# Altium PCB Staravia.PcbDoc
Units mil, origin at the board's own origin, x right, y up, seen from the top; angles counter-clockwise.
Board outline 2560 x 2200 mil, 2 copper layers (Top Layer, Bottom Layer); 17 components, 21 nets, 102 pads, 92 vias.
Unrouted connection lines stored in the file: 20.
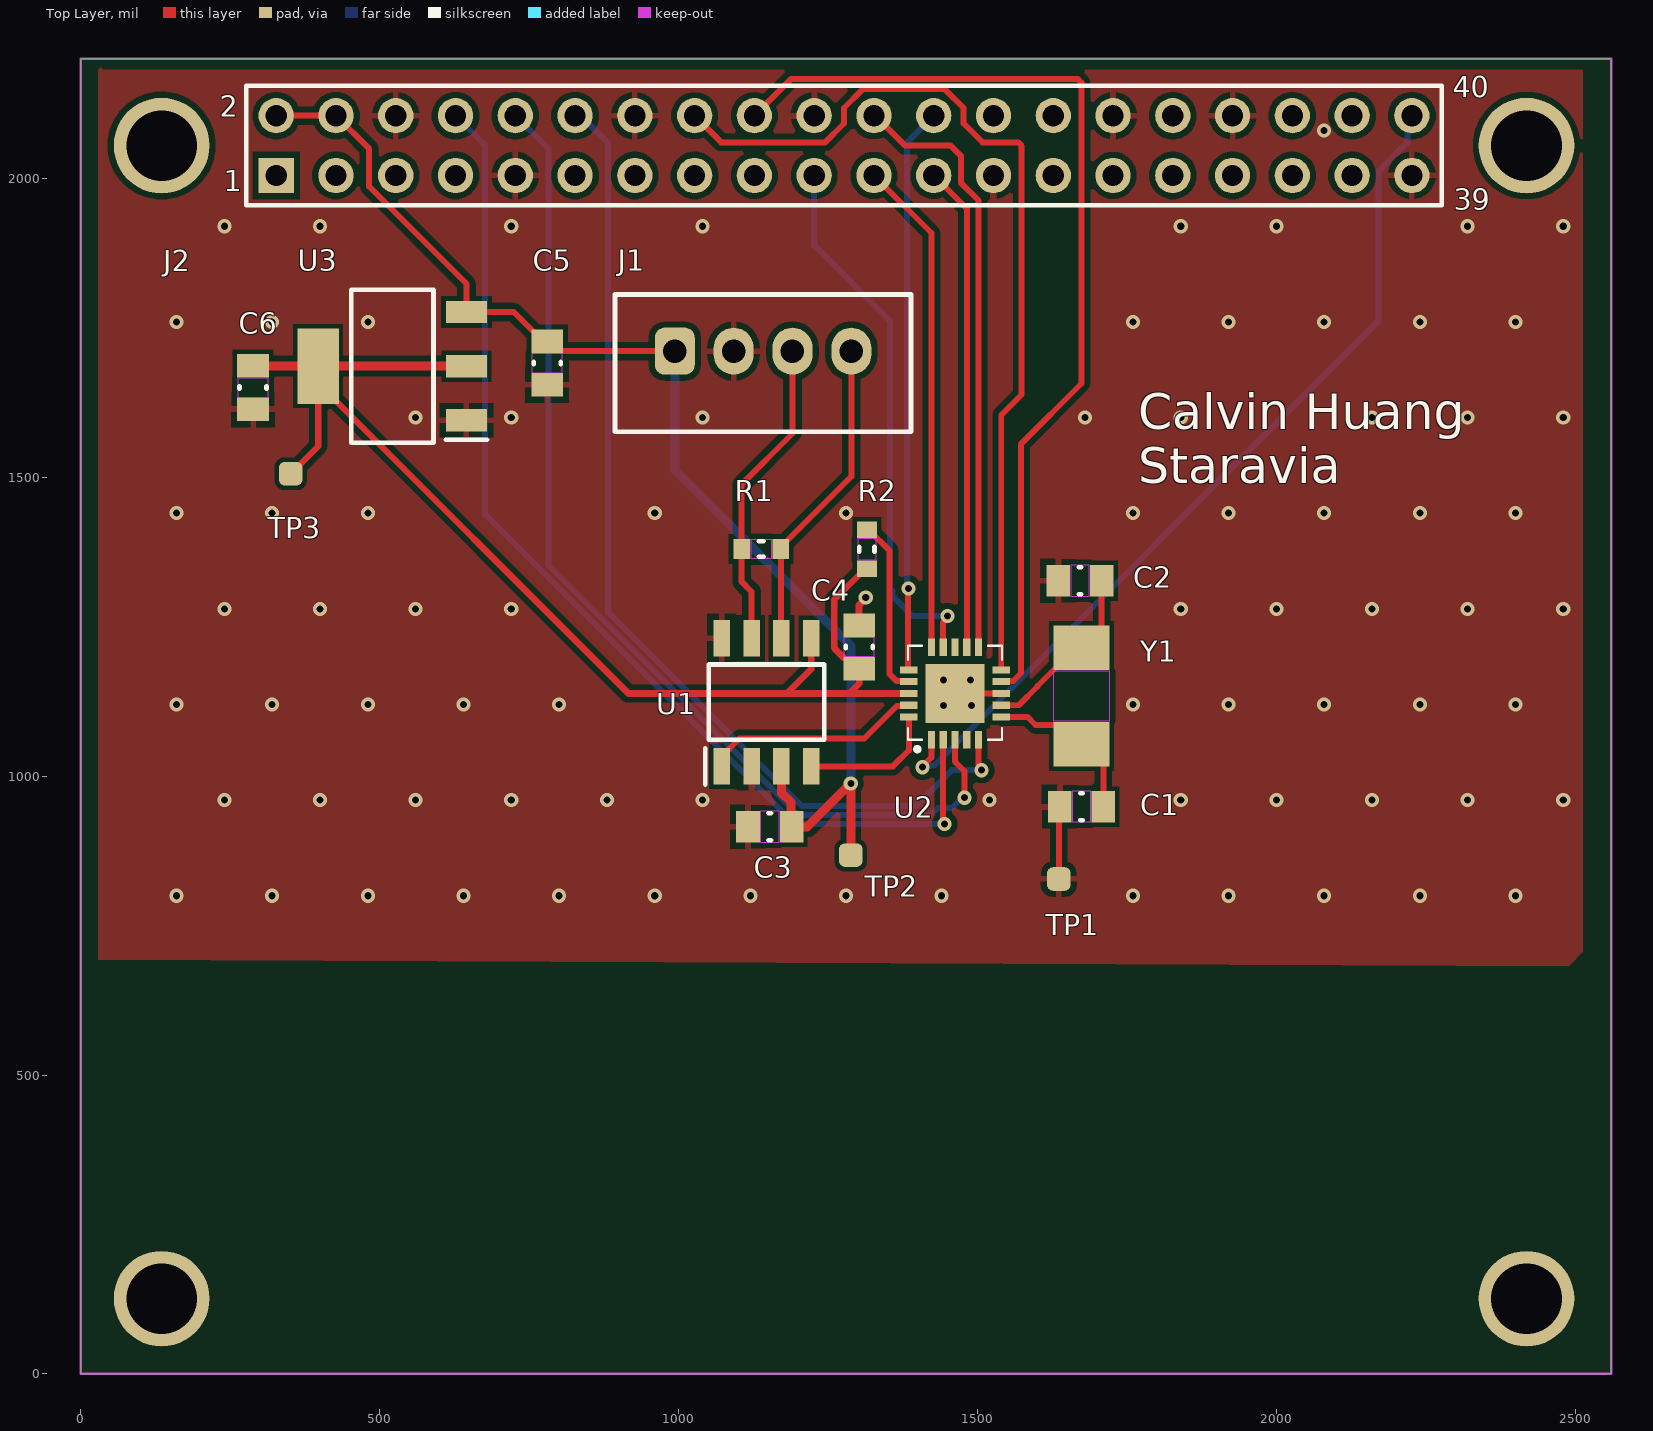
[diagram p0: Top Layer view]
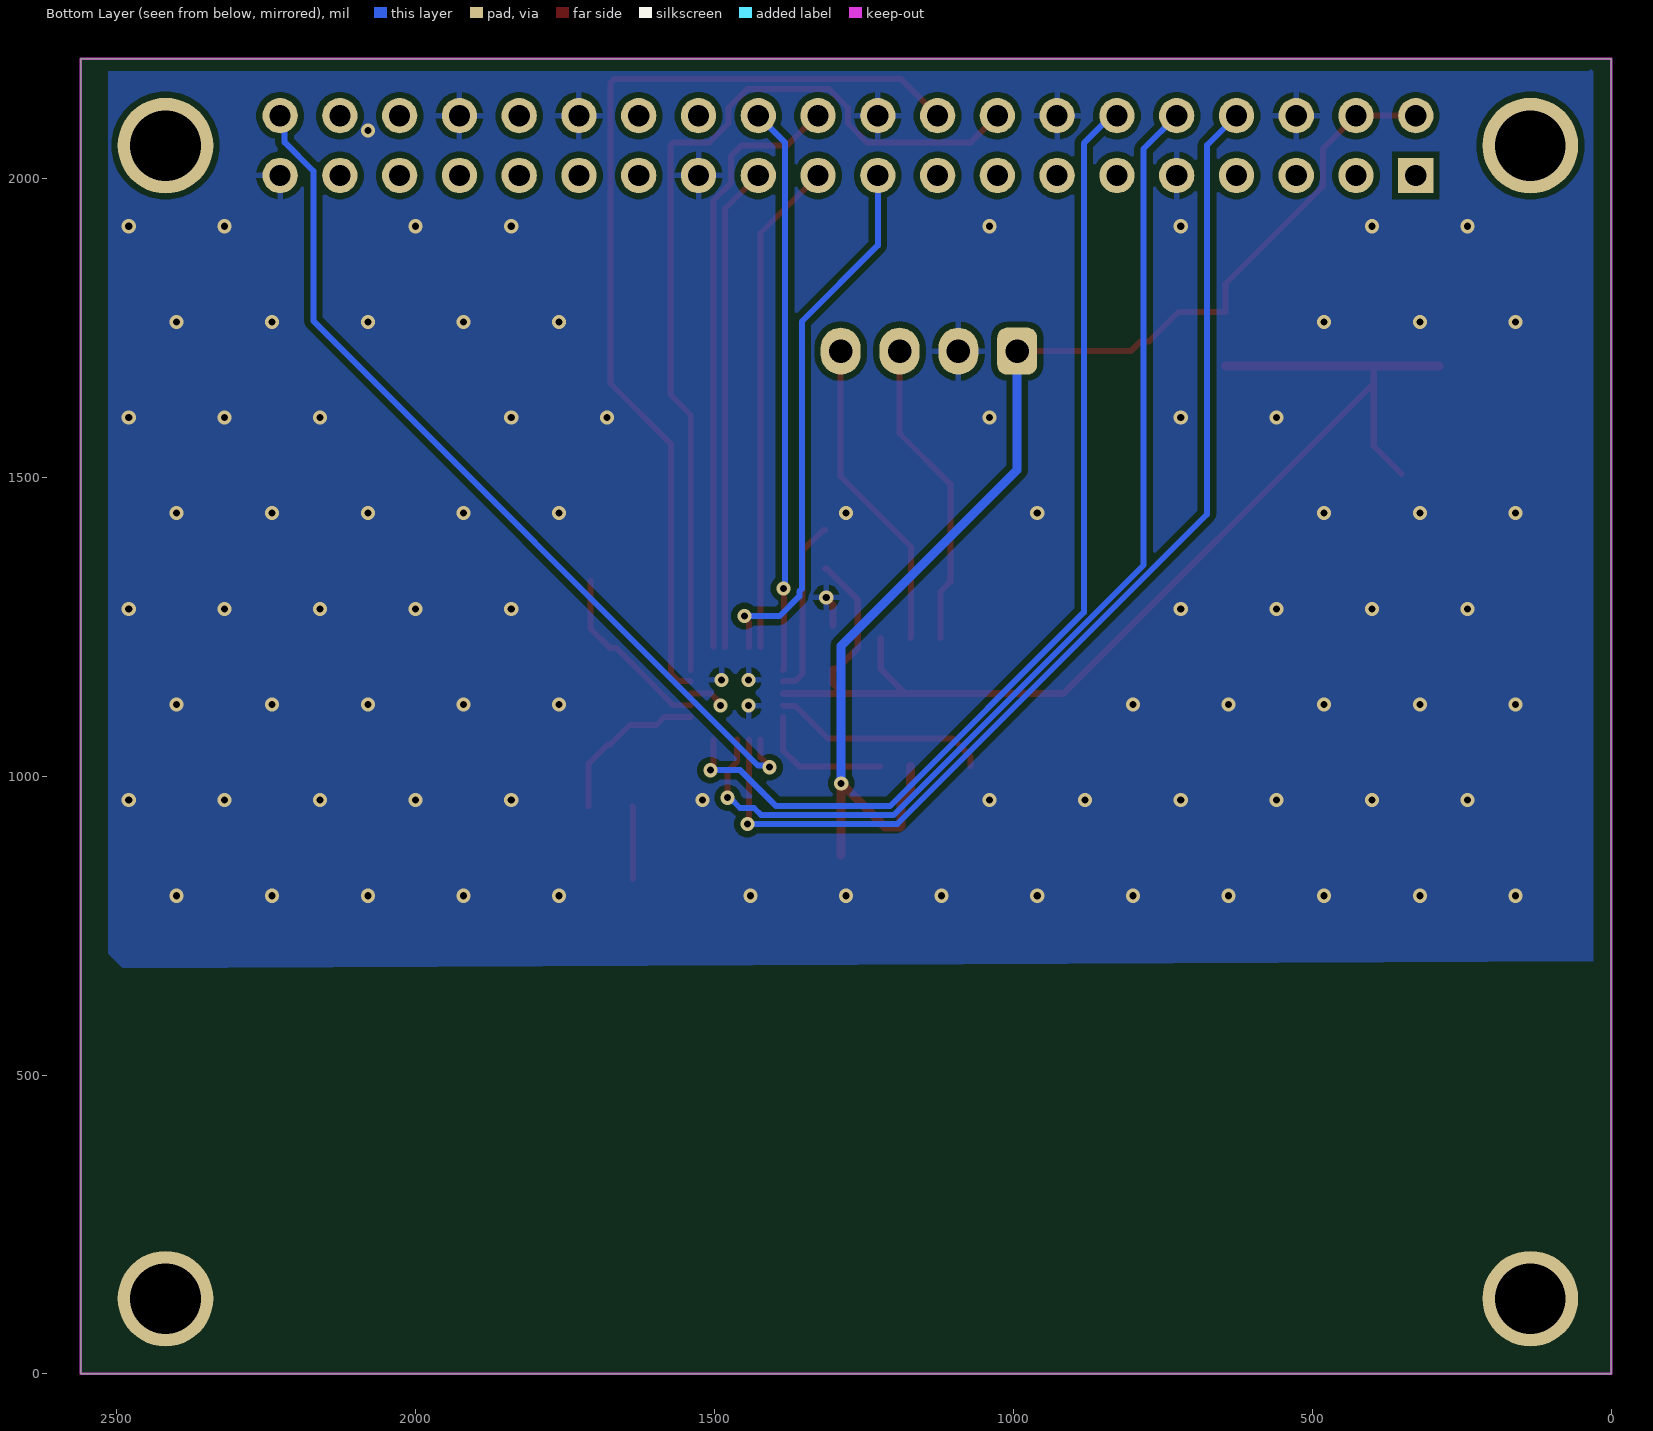
[diagram p1: Bottom Layer view, seen from below]
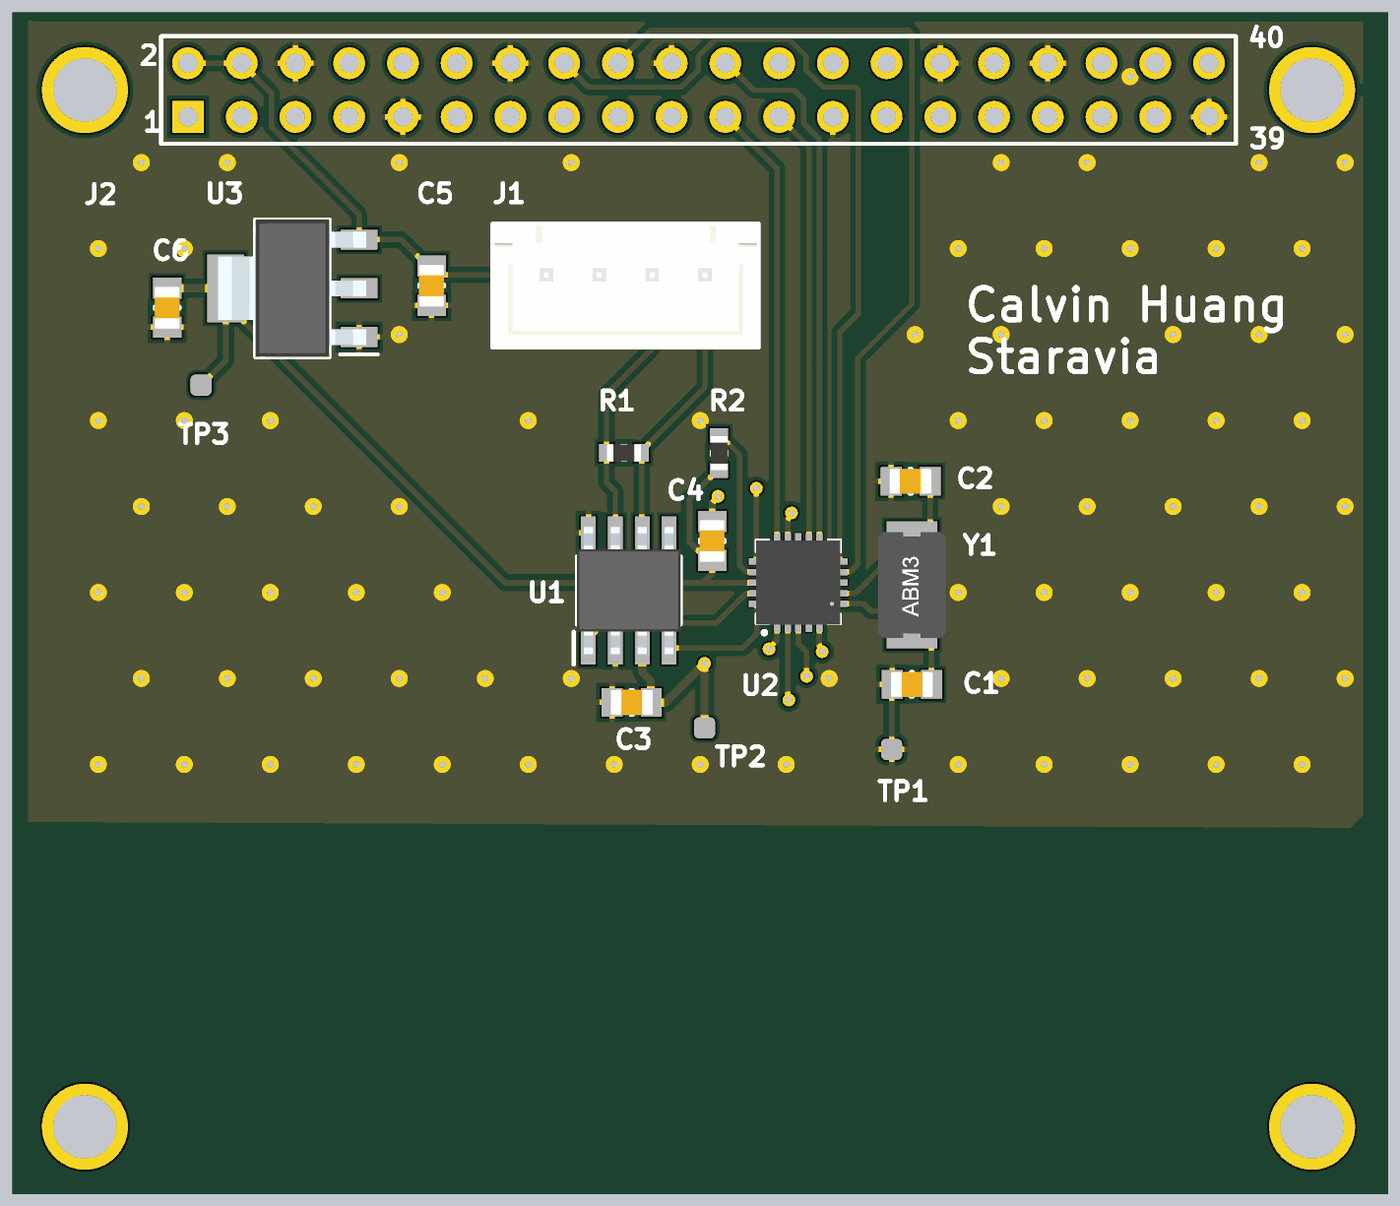
[diagram p2: 3D render of the assembled board from above, using the file's embedded part models]

## Layer stack, top to bottom
Top Solder: solder mask 0.4, Solder Resist, Dk 3.5
Top Layer: signal copper 1.4
Dielectric 1: dielectric 12.6, FR-4, Dk 4.8
Bottom Layer: signal copper 1.4
Bottom Solder: solder mask 0.4, Solder Resist, Dk 3.5

## Board outline
0,0 2560,0 2560,2200 0,2200

## Design rules (kind name [scope] priority, off if disabled: settings)
Clearance [All] p1: gap=10 ignorepadtopadclearanceinfootprint=FALSE except(0: Arc-Hole Track-Hole SMDPad-Hole THPad-Hole Via-Hole Fill-Hole Poly-Hole Region-Hole Text-Hole; 5: Arc-Arc Arc-Track Track-Track SMDPad-SMDPad; 7.87: Arc-SMDPad Track-SMDPad SMDPad-Fill SMDPad-Poly SMDPad-Region)
PolygonConnect [All] p1: connectstyle=Relief reliefconductorwidth=10 reliefentries=4 polygonreliefangle="90 Angle" airgapwidth=10
RoutingVias [All] p1: holewidth=19.68 width=39.37 viastyle="Through Hole" minholewidth=7.87 minwidth=23.62 maxholewidth=28 maxwidth=50
SilkToSolderMaskClearance [IsPad] p1: minsilkscreentomaskgap=5.91 clearancetoexposedcopper=TRUE
SolderMaskExpansion [All] p1: expansion=4 istentingtop=FALSE
Width [All] p1: maxlimit=15 minlimit=10 preferedwidth=15 toplayer_prefwidth=10 minimp=50.000000 maximp=50.000000 favimp=50.000000
29 further rules are at their usual default settings.

## Components (designator, comment, footprint, x,y, rotation, side; value= is the part's Value field where it differs from the comment)
C1 "Capacitor - Nonpolarized" "0805 - Capacitor" 1674,949 r0 top value=27pF
C2 "Capacitor - Nonpolarized" "0805 - Capacitor" 1671.42,1327 r0 top value=27pF
C3 "Capacitor - Nonpolarized" "0805 - Capacitor" 1152.44,915.47 r0 top value=100nF
C4 "Capacitor - Nonpolarized" "0805 - Capacitor" 1302,1216 r270 top value=100nF
C5 "Capacitor - Nonpolarized" "0805 - Capacitor" 780,1691 r270 top value=10uF
C6 "Capacitor - Nonpolarized" "0805 - Capacitor" 288,1650 r90 top value=10uF
J1 "JST4PINXH" B4B-XH 993.57,1711 r0 top
J2 "Header 20X2" HDR2X20 326.73,2005 r0 top locked
R1 "Resistor" "0603 - Resistor" 1138,1380 r180 top value=120
R2 "Resistor" "0603 - Resistor" 1315,1379.48 r270 top value=10K
TP1 "Test Point" "Test Point" 1636,828 r90 top
TP2 "Test Point" "Test Point" 1288,868 r90 top
TP3 "Test Point" "Test Point" 351,1506 r90 top
U1 "TJA1051T_3,118" TJA1051T/3,118 1147,1123.72 r90 top
U2 "MCP2515-E/SO" MCP2515-I/ML 1422.99,1061.01 r90 top
U3 "TLV1117-33IDCYR" TLV1117 521,1686 r180 top
Y1 "Oscillator" "2-SMD NO LEAD CRSYSTAL" 1674,1134 r90 top value=16MHz

## Footprints (in the part's own frame and the unit in brackets; to place one, negate y for a bottom-side part, rotate by r counter-clockwise, add the part's x,y. Pads: shape width x height; smd on the part's side, far side on the other; paste and mask are expansions set on the pad)
"2-SMD NO LEAD CRSYSTAL" [mm]
  rect 1.9x2.4 smd: 1(-2.05,0) 2(2.05,0)
  Top Layer keep-out region: -1.05,1.2 -1.05,-1.2 1.05,-1.2 1.05,1.2
  body extent -2.5,-1.6 2.5,1.6, height 1.3
"0603 - Resistor" [mm] "0603 Chip Resistor - IPC Medium Density"
  rect 0.7x0.85 smd: 1(-0.825,0) 2(0.825,0)
  Top Layer keep-out region: -0.45,0.4 -0.45,-0.4 0.45,-0.4 0.45,0.4
  silkscreen extent -0.1,-0.33 0.1,0.33, body extent -0.8,-0.4 0.8,0.4, height 0.45
"0805 - Capacitor" [mm] "0805 Chip Capacitor - IPC Medium Density"
  rect 1x1.35 smd: 1(-0.925,0) 2(0.925,0)
  Top Layer keep-out region: -0.4,0.65 -0.4,-0.65 0.4,-0.65 0.4,0.65
  silkscreen extent -0.05,-0.58 0.05,0.58, body extent -1,-0.6 1,0.6, height 1.2
B4B-XH [mm] "JST 4-Pin"
  rrect50% 1.7x2 hole 1: 1(0,0)
  oval 1.7x2 hole 1: 2(2.5,0) 3(5,0) 4(7.5,0)
  silkscreen extent -2.54,-3.43 10.03,2.41, body extent -2.45,-3.4 9.95,2.35, height 7
HDR2X20 [mm] "Connector; Header; 20x2 Position"
  rect 1.5x1.5 hole 0.9: 1(0,0)
  round 1.5 hole 0.9: 2(0,2.54) 3(2.54,0) 4(2.54,2.54) 5(5.08,0) 6(5.08,2.54) 7(7.62,0) 8(7.62,2.54) 9(10.16,0) 10(10.16,2.54) 11(12.7,0) 12(12.7,2.54) 13(15.24,0) 14(15.24,2.54) 15(17.78,0) 16(17.78,2.54) 17(20.32,0) 18(20.32,2.54) 19(22.86,0) 20(22.86,2.54) 21(25.4,0) 22(25.4,2.54) 23(27.94,0) 24(27.94,2.54) 25(30.48,0) 26(30.48,2.54) 27(33.02,0) 28(33.02,2.54) 29(35.56,0) 30(35.56,2.54) 31(38.1,0) 32(38.1,2.54) 33(40.64,0) 34(40.64,2.54) 35(43.18,0) 36(43.18,2.54) 37(45.72,0) 38(45.72,2.54) 39(48.26,0) 40(48.26,2.54)
  silkscreen extent -1.27,-1.27 49.53,3.81
MCP2515-I/ML [mm] "20-VFQFN Exposed Pad"
  rect 0.3x0.73 smd mask+0.07: 1(1.465,0.965) 2(0.965,0.965) 7(0.965,-2.965) 8(1.465,-2.965) 9(1.965,-2.965) 10(2.465,-2.965) 11(2.965,-2.965) 16(2.965,0.965) 17(2.465,0.965) 18(1.965,0.965)
  rect 0.73x0.3 smd mask+0.07: 3(0,0) 4(0,-0.5) 5(0,-1) 6(0,-2) 12(3.93,-2) 13(3.93,-1.5) 14(3.93,-0.5) 15(3.93,0) 19(0,-1.5) 19(3.93,-1)
  rect 2.5x2.5 smd: 9(1.965,-1)
  silkscreen extent -0.45,-3 4,1, body extent -0.03,-2.99 3.96,0.99, height 0.99
"Test Point" [mm] "Test Point"
  rrect50% 1x1 smd: 1(0,0)
TJA1051T/3,118 [mm] "SOIC127P600X175-8N"
  rect 1.55x0.7 smd: 1(-2.725,1.905) 2(-2.725,0.635) 3(-2.725,-0.635) 4(-2.725,-1.905) 5(2.725,-1.905) 6(2.725,-0.635) 7(2.725,0.635) 8(2.725,1.905)
  silkscreen extent -3.5,-2.45 1.6,2.61, body extent -3,-2.45 3,2.45, height 1.75
TLV1117 [mm] "SOT230P700X180-4N"
  rect 1.75x0.95 smd: 1(-3.15,2.3) 2(-3.15,0) 3(-3.15,-2.3)
  rect 1.75x3.2 smd: 2(3.15,0)
  silkscreen extent -4.03,-3.25 1.75,3.25, body extent -3.5,-3.25 3.5,3.25, height 1.8

## Part data
C1 C2: "Nonpolarized Capacitor", Manufacturer=Yageo, Manufacturer Part Number=CC0805JRNPO9BN270, Supplier Part Number=311-1104-1-ND, Supplier=Digikey
C3 C4: "Nonpolarized Capacitor", Manufacturer=Yageo, Manufacturer Part Number=CC0805KRX7R8BB104, Supplier Part Number=311-1141-1-ND, Supplier=Digikey
C5 C6: "Nonpolarized Capacitor", Manufacturer=Yageo, Manufacturer Part Number=CC0805KFX7R6BB106, Supplier Part Number=13-CC0805KFX7R6BB106CT-ND, Supplier=Digikey
J1: library part "1x4 Header", "1x4 Pin Header"
J2: "Header, 20-Pin, Dual row", LatestRevisionDate=17-Jul-2002, LatestRevisionNote="Re-released for DXP Platform.", Publisher="Altium Limited"
R1: Manufacturer=Yageo, Manufacturer Part Number=RC0603FR-07120RL, Supplier Part Number=311-120HRCT-ND, Supplier=Digikey
R2: Manufacturer=Yageo, Manufacturer Part Number=RC0603FR-0710KL, Supplier Part Number=311-10.0KHRCT-ND, Supplier=Digikey
U1: "CAN Transceiver IC 4.5V-5.5V 250ns", Manufacturer=NXP, Manufacturer Part Number=TJA1051T/3,118, Supplier Part Number=568-8684-1-ND, ComponentLink1Description=Datasheet, ComponentLink1URL=http://www.nxp.com/docs/en/data-sheet/TJA1051.pdf, Datasheet=http://www.nxp.com/docs/en/data-sheet/TJA1051.pdf, Supplier=Digikey
U2: "SPI->CAN Controller", Manufacturer=Microchip, Supplier Part Number=MCP2515-E/SO-ND, ComponentLink1Description=Datasheet, ComponentLink1URL=https://ww1.microchip.com/downloads/en/DeviceDoc/MCP2515-Stand-Alone-CAN-Controller-with-SPI-20001801J.pdf, Manufacturer Part Number=MCP2515-E/SO, Supplier=Digikey
U3: "Linear Voltage Regulator IC 3.3V 800MA SOT223-4", Manufacturer="Texas Instruments", Supplier Part Number=296-21112-1-ND, ComponentLink1Description=Datasheet, ComponentLink1URL=http://www.ti.com/lit/ds/symlink/tlv1117.pdf?HQS=TI-null-null-digikeymode-df-pf-null-wwe&ts=1590668900314, Manufacturer Part Number=TLV1117-33IDCYR, Supplier=Digikey
Y1: "Crystal Oscillator", Manufacturer="Abracon LLC", Manufacturer Part Number=ABM7-16.000MHZ-4-T, Supplier Part Number=535-13460-1-ND, Supplier=Digikey

## Free pads (board coordinates)
  round 160 hole 118.11: ""(135,125.87) ""(135,2055) ""(2418.46,125.87) ""(2418.46,2055)

## Via types
v1: diameter 23.62, hole 11.81, Top Layer to Bottom Layer, 92 vias

## Nets (pads, with @x,y where several pads share a name; then routed paths per layer and width w, separated by ;. In a path a pad name is that pad's centre, name@x,y a point inside that pad or via, vN(x,y) a via of type N, cw(c..) or ccw(c..) an arc to the next point about the centre after c; other vN are vias at no path point)
+3.3V: C4.2 C6.2 R2.2 TP3.1 U1.5 U2.18 U3.2 | length 2130.3
  Top Layer w11: TP3.1 396.98,1551.98 U3.2@396.98,1657.46 ; U3.2@396.57,1686.42 396.98,1686 U3.2@396.98,1657.46 ; U1.5 1222,1179.37 1181,1138.37 ; R2.2 1312.05,1347 1260.05,1295 1260.05,1214.64 1295.11,1179.58 C4.2 1302,1155 1285.37,1138.37 ; U2.18 1285.37,1138.37 ; U3.2@396.98,1657.46 916.07,1138.37 1181,1138.37 ; 1181,1138.37 1285.37,1138.37
  Top Layer w15: C6.2 U3.2@396.57,1686.42 ; U3.2@396.98,1686 U3.2@645.02,1686
+5V: C3.2 C5.1 J1.1 J2.2 J2.4 TP2.1 U1.3 U3.3 | length 2097.1
  Top Layer w10: J2.2 J2.4 482.2,2049.53 482.2,1986.56 645.02,1823.75 U3.3 723.98,1776.55 773.11,1727.42 C5.1 786.89,1727.42 803.31,1711 J1.1
  Top Layer w15: U1.3 1172,972 1188,956 1188,916.33 C3.2 1189.33,915 1215,915 v1(1288,988) TP2.1
  Bottom Layer w15: J1.1 993.57,1512.43 1288,1218 v1(1288,988)
C\S\: J2.24 U2.16 | length 947.2
  Top Layer w10: v1(1384.47,1314.09) 1384.09,1313.72 1384.09,1178.65 U2.16
  Bottom Layer w10: v1(1384.47,1314.09) 1382.2,1316.35 1382.2,2060.47 J2.24
CANH: J1.3 R1.2 U1.7 | length 522
  Top Layer w10: U1.7 1122,1308.54 1105.52,1325.02 R1.2 1105.52,1488.42 1190.43,1573.33 J1.3
CANL: J1.4 R1.1 U1.6 | length 529.7
  Top Layer w10: U1.6 1171.24,1231.76 1171.24,1379.24 R1.1 1170.48,1382.95 1288.85,1501.32 J1.4
CANRX: U1.4 U2.2 | length 230
  Top Layer w10: U1.4 1358.43,1016.43 1385,1043 U2.2
CANTX: U1.1 U2.1 | length 365.2
  Top Layer w10: U1.1 1072,1033.17 1101.83,1063 1310.52,1063 1365.3,1117.78 1384.09,1117.78 U2.1
CLKOUT: J2.40 U2.3 | length 1491.1
  Top Layer w10: v1(1408,1015) 1408,1016.65 1422.99,1031.64 U2.3
  Bottom Layer w10: v1(1408,1015) 1410.61,1017.61 1427.21,1017.61 2171.26,1761.65 2171.26,2012.5 2219.23,2060.47 2219.23,2097.5 J2.40
GND: C1.1 C2.1 C3.1 C4.1 C5.2 C6.1 J1.2 J2.6 J2.9 J2.14 J2.20 J2.25 J2.30 J2.34 J2.39 TP1.1 U1.2 U1.8 U2.9 U3.1 | length 233.3
  Top Layer w10: v1(1489.69,1118) 1489.69,1121.48 1506.57,1138.37 U2.9@1539.72,1138.37 ; TP1.1 1636,947.42 C1.1
  Top Layer w12: C4.1 1302,1286.6 1313,1297.6 v1(1313,1299)
  other v1: 160,800 320,800 480,800 640,800 800,800 960,800 1120,800 1280,800 1440,800 1760,800 1920,800 2080,800 2240,800 2400,800 240,960 400,960 560,960 720,960 880,960 1040,960 1520,960 1840,960 2000,960 2160,960 2320,960 2480,960 1443,1118 160,1120 320,1120 480,1120 640,1120 800,1120 1760,1120 1920,1120 2080,1120 2240,1120 2400,1120 1443,1161 1488,1161 240,1280 400,1280 560,1280 720,1280 1840,1280 2000,1280 2160,1280 2320,1280 2480,1280 160,1440 320,1440 480,1440 960,1440 1280,1440 1760,1440 1920,1440 2080,1440 2240,1440 2400,1440 560,1600 720,1600 1040,1600 1680,1600 1840,1600 2160,1600 2320,1600 2480,1600 160,1760 320,1760 480,1760 1760,1760 1920,1760 2080,1760 2240,1760 2400,1760 240,1920 400,1920 720,1920 1040,1920 1840,1920 2000,1920 2320,1920 2480,1920 2080,2080
INT: J2.22 U2.12 | length 1007.6
  Top Layer w10: J2.22 1329,2105 1379,2055 1455,2055 1472,2038 1472,1993 1501.73,1963.27 U2.12
MISO: J2.21 U2.15 | length 829.1
  Top Layer w10: J2.21 1422.99,1908.74 U2.15
MOSI: J2.19 U2.14 | length 919
  Top Layer w10: U2.14 1442.68,1257.19 1449.8,1264.31 v1(1449.8,1268)
  Bottom Layer w10: J2.19 1226.73,1888 1354,1760.73 1354,1313.23 1358.12,1309.11 1358.12,1301 1391.12,1268 v1(1449.8,1268)
NetR2_1: R2.1 U2.17 | length 296
  Top Layer w10: R2.1 1317.95,1411.96 1353,1376.91 1353,1170.65 1364.69,1158.96 1370.89,1158.96 1384.09,1158.96 U2.17
OSCIN: C2.2 U2.8 Y1.2 | length 301.8
  Top Layer w10: U2.8 1569.09,1118.69 1600.43,1150.02 1600.43,1150.98 1664.16,1214.71 Y1.2 1675.43,1214.71 1707.83,1247.11 C2.2
OSCOUT: C1.2 U2.7 Y1.1 | length 274.9
  Top Layer w10: U2.7 1583.77,1099 1597.08,1085.69 1641.6,1085.69 Y1.1 1678.02,1053.29 1710.42,1020.89 C1.2
RX0BF: J2.16 U2.11 | length 1563.4
  Top Layer w10: J2.16 1071.26,2060.47 1245.18,2060.47 1276.73,2092.03 1276.73,2117.97 1308.29,2149.53 1445.18,2149.53 1476.73,2117.97 1476.73,2092.03 1508.29,2060.47 1568.14,2060.47 1574,2054.61 1574,1638.46 1539.72,1604.19 U2.11
RX1BF: J2.18 U2.10 | length 1643.7
  Top Layer w10: J2.18 1187.73,2166 1668.14,2166 1674,2160.14 1674,1657 1573,1556 1573,1172.53 1559.43,1158.96 1540.63,1158.96 U2.10
SCK: J2.23 U2.13 | length 812.2
  Top Layer w10: J2.23 1482.05,1949.69 U2.13
TX0RTS: J2.8 U2.4 | length 1812.9
  Top Layer w10: U2.4 1442.68,922.32 v1(1445,920)
  Bottom Layer w10: J2.8 676,2055.73 676,1438 1194,920 v1(1445,920)
TX1RTS: J2.10 U2.5 | length 1759.4
  Top Layer w10: U2.5 1462.36,1024.28 1478,1008.64 v1(1478,964)
  Bottom Layer w10: J2.10 782.2,2049.53 782.2,1353.01 1200.21,935 1422.08,935 1433.89,946.81 1457.27,946.81 1474.46,964 v1(1478,964)
TX2RTS: J2.12 U2.6 | length 1696.3
  Top Layer w10: U2.6 1501.73,1018.95 1507,1013.69 v1(1507,1010)
  Bottom Layer w10: J2.12 836,2105 882.2,2058.8 882.2,1274.22 1206.43,950 1397,950 1457,1010 v1(1507,1010)
pads on no net: J2.1 J2.3 J2.5 J2.7 J2.11 J2.13 J2.15 J2.17 J2.26 J2.27 J2.28 J2.29 J2.31 J2.32 J2.33 J2.35 J2.36 J2.37 J2.38 U2.19

## Polygon pours and split planes (outlines as drawn)
GND on Top Layer "GND_L01_P001" (solid, remove dead copper, pour order 1): 2489,682 2513,706 2513,2182 37,2182 33,2186 29,2182 29,693
GND on Bottom Layer "GND_L02_P000" (solid, remove dead copper, pour order 0): 2490,679 2514,703 2514,2179 38,2179 34,2183 30,2179 30,690

## Keep-outs
Keep-Out Layer:
  the board outline again, w3.94

## Silkscreen, mask and mechanical layers (free items; w line width, h text height)
Top Overlay:
  text "Calvin Huang / Staravia" at 1769,1490 h60

## Text inside footprints (layer, text, board x,y; h text height)
J2: Top Overlay "1" at 239,1979 h35; Top Overlay "2" at 232,2103 h35; Top Overlay "40" at 2295,2136 h35; Top Overlay "39" at 2297,1948 h35